# Altium PCB ALTAIR_PD_Soldier_V26.1c.PcbDoc (part 3 of 4)
Units mm, origin at the board's own origin, x right, y up, seen from the top; angles counter-clockwise.
Board outline 74 x 56 mm, 4 copper layers (Top Layer, Layer 1, Layer 2, Bottom Layer), stack 1.675 mm thick; 206 components, 124 nets, 616 pads, 540 vias.
Unrouted connection lines stored in the file: 139.
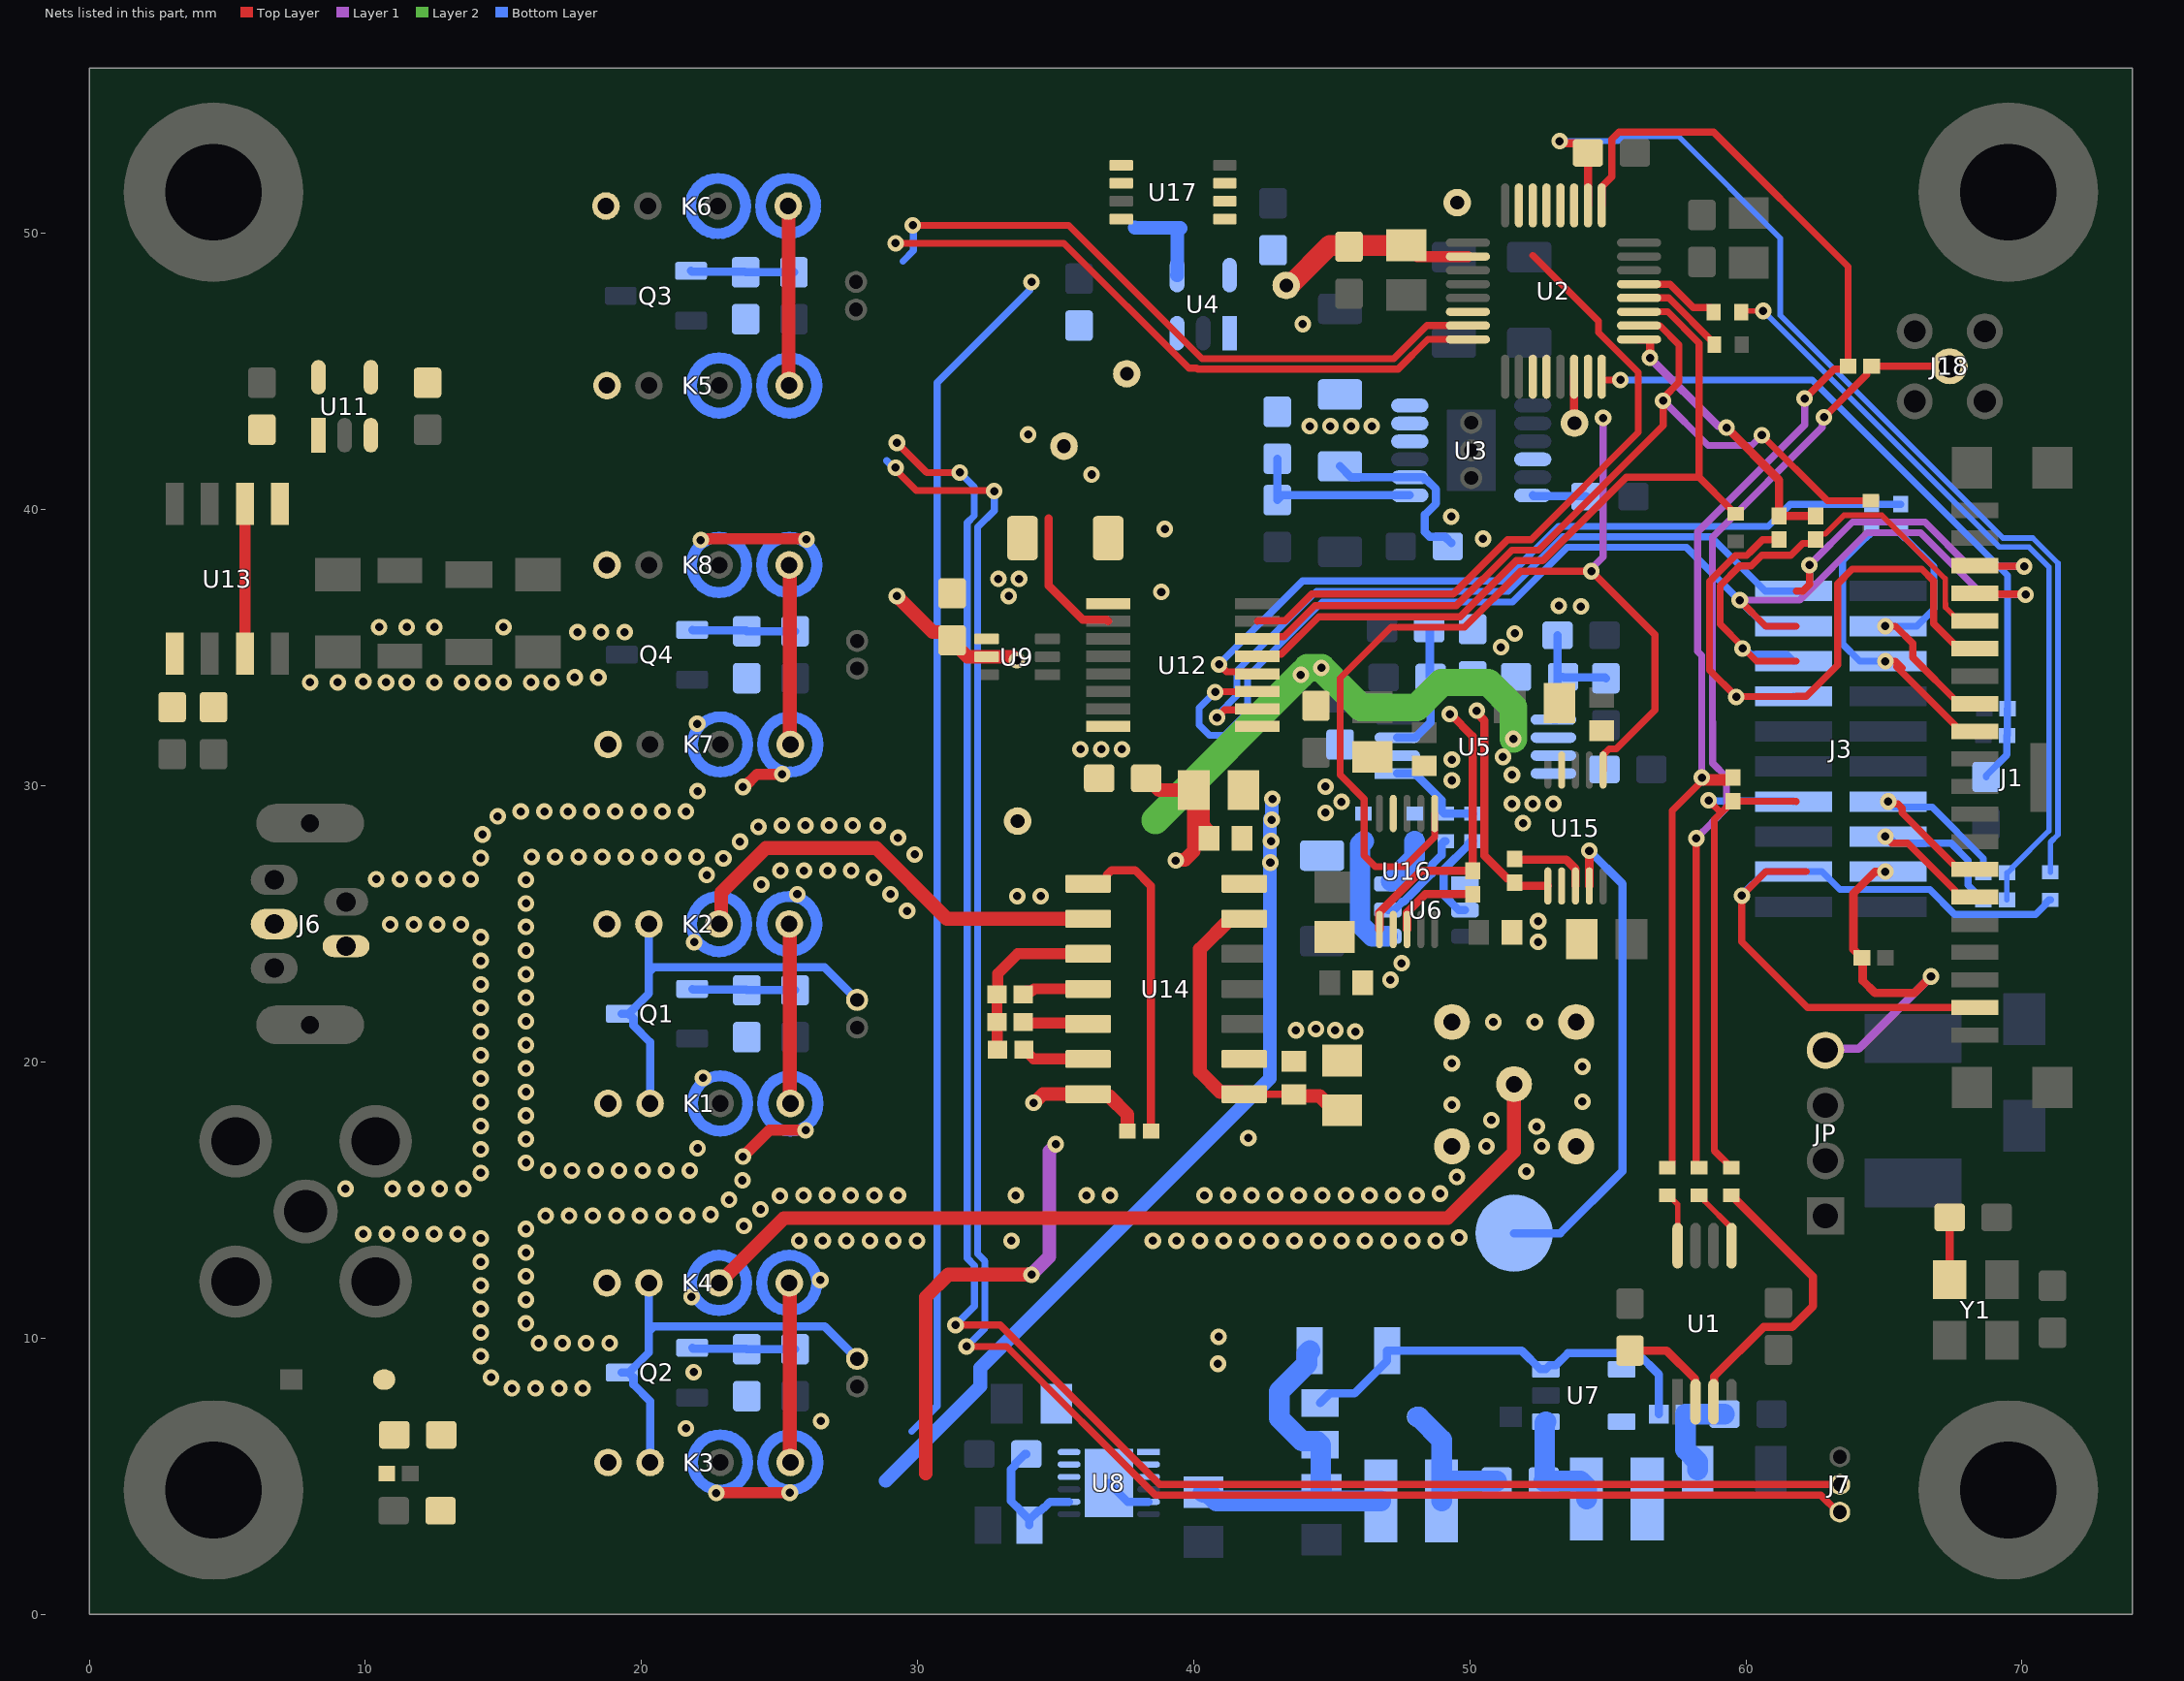
[diagram p4: the nets of this part, all layers, seen from the top]

## Via types
v1: diameter 0.6, hole 0.3, Top Layer to Bottom Layer, tented both sides, 212 vias
v2: diameter 0.6, hole 0.3, Top Layer to Bottom Layer, 206 vias
v3: diameter 0.8, hole 0.5, Top Layer to Bottom Layer, 122 vias

## Nets (pads, with @x,y where several pads share a name; then routed paths per layer and width w, separated by ;. In a path a pad name is that pad's centre, name@x,y a point inside that pad or via, vN(x,y) a via of type N, cw(c..) or ccw(c..) an arc to the next point about the centre after c; other vN are vias at no path point) (continued)
NetR52_2: (continued)
  Top Layer w0.4: R52.2@33.825,22.45 33.95,22.575 34.134,22.575 34.209,22.65 U14.4@36.175,22.65
NetR53_2: R53.2 U14.5 | length 2.4
  Top Layer w0.4: R53.2@33.825,21.446 33.858,21.413 36.142,21.413 U14.5@36.175,21.38
NetR54_2: R54.2 U14.6 | length 2.5
  Top Layer w0.4: R54.2@33.85,20.441 33.875,20.441 34.206,20.11 U14.6@36.175,20.11
NetR55_1: R55.1 U14.1 | length 11.7
  Top Layer w0.3: U14.1@36.175,26.46 36.675,26.46 36.85,26.635 36.85,26.774 37.026,26.95 37.875,26.95 38.45,26.375 R55.1@38.45,17.5
NetR56_1: R56.1 U15.8 | length 2.9
  Top Layer w0.3: R56.1@51.635,27.327 53.492,27.327 53.825,26.994 U15.8@53.825,26.375
NetR57_1: R57.1 U16.8 | length 3.3
  Top Layer w0.3: U16.8@47.725,24.8 47.725,25.419 48.381,26.075 R57.1@50.1,26.075
NetR58_1: R58.1 U2.12 | length 3.5
  Top Layer w0.254: U2.12@56.129,47.671 57.204,47.671 58.85,46.025 R58.1@58.85,45.975
NetR59_1: R59.1 U2.13 | length 3.1
  Top Layer w0.254: U2.13@56.129,48.171 56.138,48.162 57.252,48.162 58.091,47.323 58.702,47.323 58.825,47.2 R59.1@58.825,47.15
NetR60_1: R60.1 Y1.1 | length 2.3
  Top Layer w0.3: Y1.1@67.375,12.125 R60.1@67.375,14.375
NetR61_1: R61.1 U1.2 | length 3.6
  Top Layer w0.3: R61.1@55.8,9.55 57.125,9.55 58.16,8.515 58.16,7.715 U1.2@58.175,7.7
NetR62_2: R62.2 U1.3 | length 10.8
  Top Layer w0.3: U1.3@58.825,7.7 58.84,7.715 58.84,8.609 60.633,10.402 61.671,10.402 62.425,11.156 62.425,12.225 59.625,15.025 59.625,15.075 59.525,15.175 R62.2@59.475,15.175
NetR63_1: R63.1 R65.1 R66.2 U2.17 | length 51.2
  Top Layer w0.254: U2.17@54.779,51.021 54.788,51.03 54.788,51.713 55.138,52.063 55.138,53.424 55.393,53.679 58.83,53.679 63.7,48.809 R66.2@63.7,45.2 63.597,45.097 63.197,45.097 v1(62.125,44.025) ; R63.1@57.15,16.175 57.2,16.175 57.323,16.298 57.323,16.445 57.325,16.447 57.325,29.1 58.352,30.127 59.377,30.127 R65.1@59.525,30.275 ; v1(58.4,30.3) 59.5,30.3 R65.1@59.525,30.275 ; R65.1@59.525,30.3 R65.1@59.525,30.275
  Layer 1 w0.254: v1(58.4,30.3) 58.4,34.722 58.25,34.872 58.25,39.2 62.125,43.075 v1(62.125,44.025)
NetR63_2: R63.2 U1.8 | length 2
  Top Layer w0.2: R63.2@57.15,15.175 57.2,15.175 57.525,14.85 U1.8@57.525,13.35
NetR64_2: R64.2 U1.5 | length 2.3
  Top Layer w0.2: R64.2@58.3,15.175 58.35,15.175 58.5,15.025 58.5,14.963 59.475,13.988 U1.5@59.475,13.35
NetTP8_1: TP8.1 U2.6 | length 1.7
  Top Layer w0.3: U2.6@53.779,44.821 53.779,43.146 TP8.1@53.788,43.137
NetTP9_1: TP9.1 U2.23